# EAGLE board eNode_Spark (EAGLE 7.2.0)
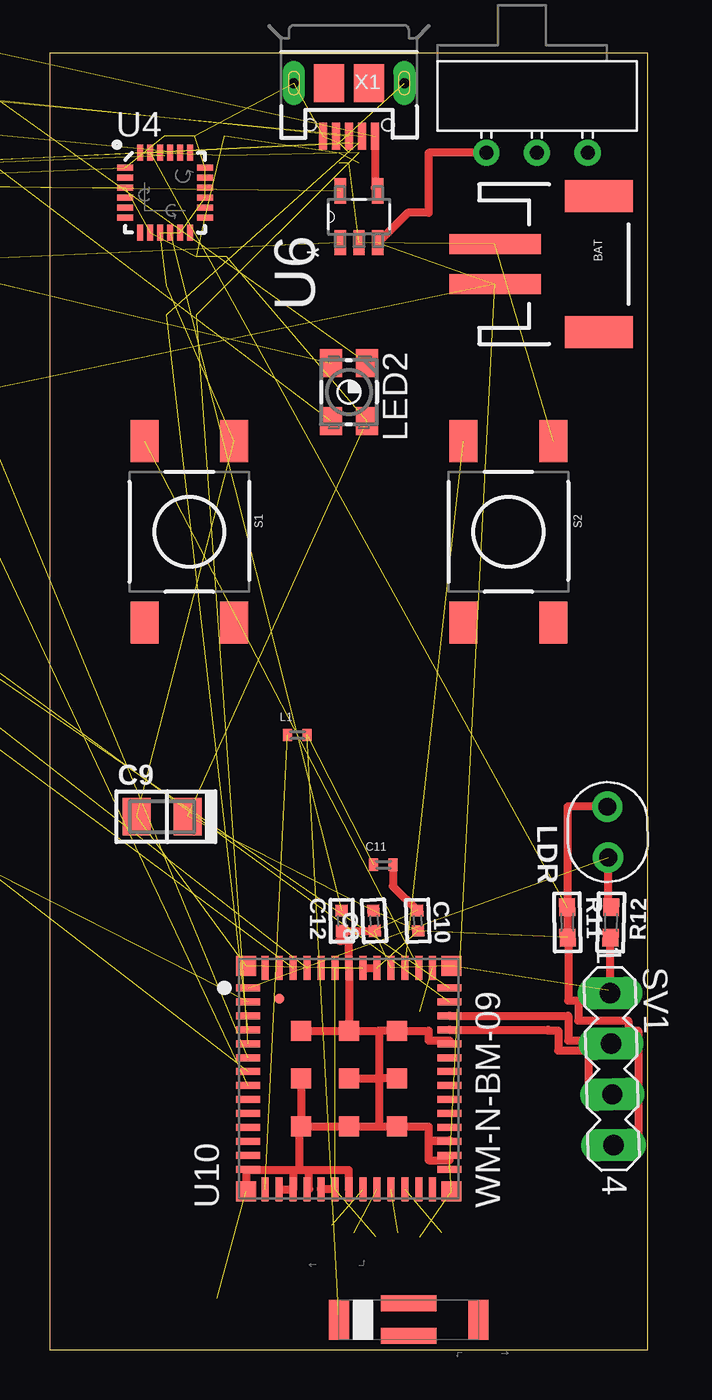
[diagram p0: board, top side]
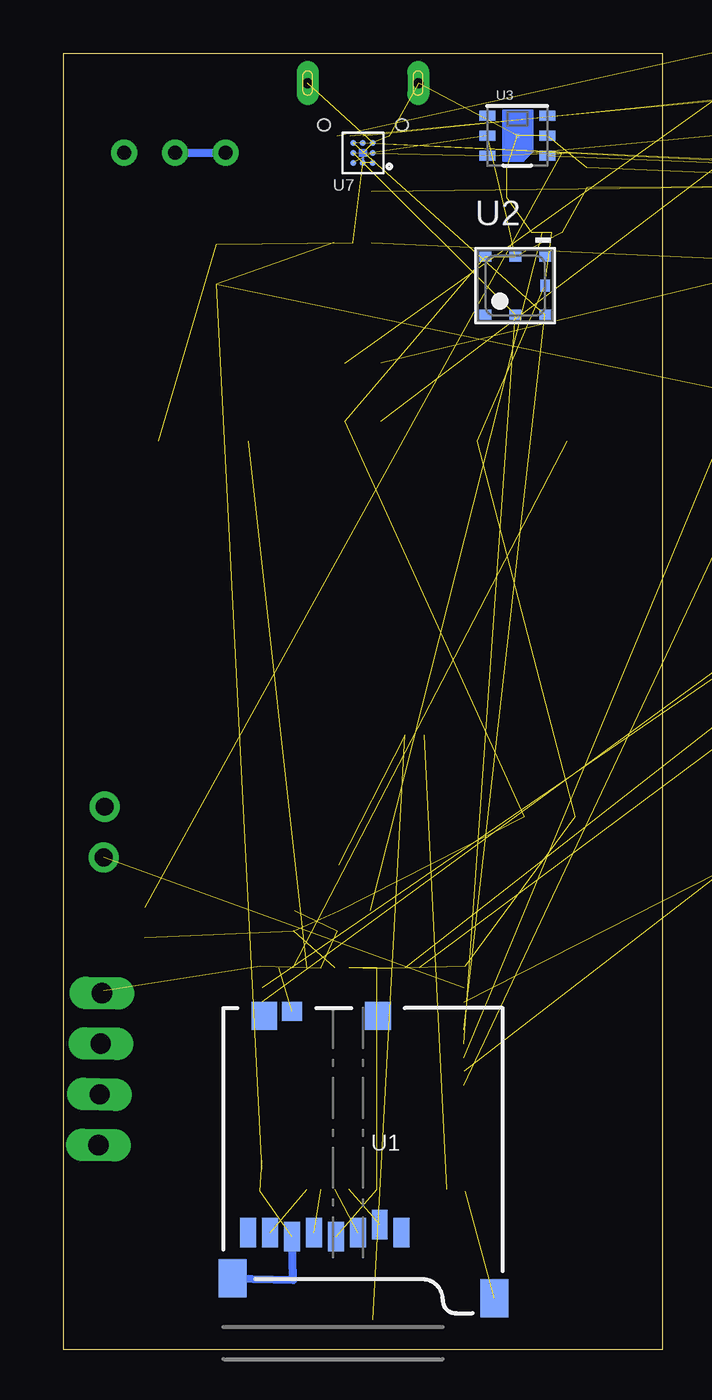
[diagram p1: board, bottom side, seen from below]

Size 30 x 65 mm. Coordinates in mm from the lower left corner, seen from the top.
Outline: 0,0 30,0 30,65 0,65 0,0
Copper layers (1+2*15+16): Top 0.018mm / dielectric 0.195mm / $GND 0.035mm / dielectric 1.1mm / $+3V3 0.035mm / dielectric 0.195mm / Bottom 0.018mm
Design rules "spark-4layer": minimum track width 6mil, minimum drill 0.3mm, track to track 6mil, track to pad 6mil, pad to pad 6mil, via to via 6mil, smd to smd 6mil, copper to edge 6mil, drill to drill 6mil, minimum pad ring 12mil, minimum via ring 8mil, stop-mask expansion 4mil, vias tented up to drill 20mil, thermal gap 8mil
Net classes: 2 RF: width 0.33 mm, clearance 0.178 mm

## Footprints (pad centres in the part's own frame; a part is rotated, then mirrored left to right if it is on the bottom)
AT7020 = smd 1 x 2: 1 3.5,0; 3 -3.5,0 | smd 2.8 x 0.8: 2 0,0.815; 4 0,-0.815
JST-2-SMD = smd 1 x 4.6: + 1,-3.7; - -1,-3.7 | smd 1.6 x 3.4: NC1 -3.4,1.5; NC2 3.4,1.5
OFFBOARD_NOSIGN = drill 1: + -1.27,0; - 1.27,0
C0402 = smd 0.6 x 0.6: 1 -0.508,0; 2 0.508,0
C1206/T = smd 1.4 x 1.9: + 1.27,0; - -1.27,0
C0402_B = smd 0.457 x 0.61: 1 -0.483,0; 2 0.483,0
C0603 = smd 1.1 x 1: 1 -0.85,0; 2 0.85,0
C0402' = smd 0.7 x 0.9: 1 -0.65,0; 2 0.65,0
DIODE-DO-220AA(SMP) = smd 0.762 x 1.27: ANODE 2.349,0 | smd 2.667 x 2.286: CATHODE 0,0
L0402_B = smd 0.457 x 0.61: 1 -0.483,0; 2 0.483,0
INDUCTOR-NR3015 = smd 0.8 x 2.7: 1 -1.1,0; 2 1.1,0
ON_BOARD = drill 0.9: 1 -1.27,0; 2 1.27,0
RA_SMD_LED = smd 1.4 x 0.9: A 1.2,0; C -1.2,0
P-LCC-4-3 = smd 1.1 x 1.4: 1 -0.9,-1.45; 2 0.9,-1.45; 3 0.9,1.45; 4 -0.9,1.45
R0603 = smd 0.9 x 0.8: 1 -0.762,0; 2 0.762,0
R0402_B = smd 0.457 x 0.61: 1 -0.483,0; 2 0.483,0
R0402 = smd 0.6 x 0.6: 1 -0.508,0; 2 0.508,0
TACTILE_SWITCH_SMD = smd 1.4 x 2.1: 1 2.25,4.55; 2 2.25,-4.55; 3 -2.25,4.55; 4 -2.25,-4.55
MA04-1 = drill 1.016 long: 1 -3.81,0; 2 -1.27,0; 3 1.27,0; 4 3.81,0
CHANGE_OVER_SLIDE = drill 0.7: 1 0,0; 2 -2.54,0; 3 2.54,0
MICRO-SD-SOCKET-PP = smd 0.8 x 1.5: 1 7.54,-11.26; 2 6.44,-10.86; 3 5.34,-11.26; 4 4.24,-11.46; 5 3.14,-11.26; 6 2.04,-11.46; 7 0.94,-11.26; 8 -0.16,-11.26 | smd 1 x 0.95: CD 2.04,-0.175 | smd 1.3 x 1.4: CD1 6.35,-0.4; CD2 0.65,-0.4 | smd 1.4 x 1.9: GND1 12.2,-14.55; GND2 -0.95,-13.55
BMP180 = smd 0.6 x 0.5: 1 1.5,1.45; 2 0,1.45; 3 -1.5,1.45; 4 -1.5,-1.45; 5 0,-1.45; 6 1.5,-1.45 | smd 0.5 x 0.6: 7 1.5,0
HTU21D = smd 0.2 x 0.2: 7 0,0 | smd 0.8 x 0.5: DATA 1.5,-1; GND 1.5,0; NC@1 -1.5,1; NC@6 1.5,1; SCK -1.5,-1; VDD -1.5,0
QFN-24-NP = smd 0.8 x 0.3: 1 -2,1.25; 2 -2,0.75; 3 -2,0.25; 4 -2,-0.25; 5 -2,-0.75; 6 -2,-1.25; 13 2,-1.25; 14 2,-0.75; 15 2,-0.25; 16 2,0.25; 17 2,0.75; 18 2,1.25 | smd 0.3 x 0.8: 7 -1.25,-2; 8 -0.75,-2; 9 -0.25,-2; 10 0.25,-2; 11 0.75,-2; 12 1.25,-2; 19 1.25,2; 20 0.75,2; 21 0.25,2; 22 -0.25,2; 23 -0.75,2; 24 -1.25,2
SOT95P280X145-5N = smd 1.27 x 0.559: 1 -1.295,0.94; 2 -1.295,0; 3 -1.295,-0.94; 4 1.295,-0.94; 5 1.295,0.94
BGA8DS = smd 0.305 x 0.305: A1 0.5,-0.5; A2 0,-0.5; A3 -0.5,-0.5; B1 0.5,0; B3 -0.5,0; C1 0.5,0.5; C2 0,0.5; C3 -0.5,0.5
SOT23-5 = smd 0.55 x 1.2: 1 -0.95,-1.3; 2 0,-1.3; 3 0.95,-1.3; 4 0.95,1.3; 5 -0.95,1.3
ADMP401 = smd 0.9 x 0.9: 1 -1.2,2.62; 5 1.2,2.62; 6 0,2.62 | smd 0.7 x 0.7: 2 1.3,-0.8; 4 -1.3,-0.8 | hole 0.9: 0,0
WM-N-BM-09 = smd 0.35 x 1.2: 1 4.55,5.05; 2 3.85,5.05; 3 3.15,5.05; 4 2.45,5.05; 5 1.75,5.05; 6 1.05,5.05; 7 0.35,5.05; 8 -0.35,5.05; 9 -1.05,5.05; 10 -1.75,5.05; 11 -2.45,5.05; 12 -3.15,5.05; 13 -3.85,5.05; 14 -4.55,5.05; 28 -4.55,-5.05; 29 -3.85,-5.05; 30 -3.15,-5.05; 31 -2.45,-5.05; 32 -1.75,-5.05; 33 -1.05,-5.05; 34 -0.35,-5.05; 35 0.35,-5.05; 36 1.05,-5.05; 37 1.75,-5.05; 38 2.45,-5.05; 39 3.15,-5.05; 40 3.85,-5.05; 41 4.55,-5.05 | smd 1.2 x 0.35: 15 -5.55,4.2; 16 -5.55,3.5; 17 -5.55,2.8; 18 -5.55,2.1; 19 -5.55,1.4; 20 -5.55,0.7; 21 -5.55,0; 22 -5.55,-0.7; 23 -5.55,-1.4; 24 -5.55,-2.1; 25 -5.55,-2.8; 26 -5.55,-3.5; 27 -5.55,-4.2; 42 5.55,-4.2; 43 5.55,-3.5; 44 5.55,-2.8; 45 5.55,-2.1; 46 5.55,-1.4; 47 5.55,-0.7; 48 5.55,0; 49 5.55,0.7; 50 5.55,1.4; 51 5.55,2.1; 52 5.55,2.8; 53 5.55,3.5; 54 5.55,4.2 | smd 1 x 1: 55 5.65,5.15; 56 -5.65,5.15; 57 -5.65,-5.15; 58 5.65,-5.15; 59 2.4,2.4; 60 0,2.4; 61 -2.4,2.4; 62 2.4,0; 63 0,0; 64 -2.4,0; 65 2.4,-2.4; 66 0,-2.4; 67 -2.4,-2.4 | smd 0.5 x 0.5: 68 4,3.5
USB-MICROB-SLOT-HOLE = smd 0.4 x 1.35: D+ 0,2.675; D- -0.65,2.675; GND 1.3,2.675; ID 0.65,2.675; VBUS -1.3,2.675 | drill 0.5 pad 1.1 long: MT1 -2.775,0; MT2 2.775,0 | smd 1.5 x 1.9: P$1 -1,0; P$2 1,0.01 | hole 0.6: -1.95,2.1; 1.95,2.1

## Placement (x,y rotation side)
ANT1  AT7020  [AT7020]  18,1.5 180 top
BAT  [JST-2-SMD]  26.03,54.42 270 top
BUZZ  BUZZER  [OFFBOARD_NOSIGN]  -35.56,57.15 0 top  (outside the outline)
C1  4.7uF  [C0402]  -45.72,58.42 0 top  (outside the outline)
C2  4.7uF  [C0402]  -49.53,58.42 0 top  (outside the outline)
C3  4.7uF  [C0402]  -53.34,58.42 0 top  (outside the outline)
C4  100pF  [C0402]  -41.91,58.42 0 top  (outside the outline)
C5  1uF  [C0402]  -57.15,63.5 0 top  (outside the outline)
C6  0.1uF  [C0402]  -57.15,58.42 0 top  (outside the outline)
C7  0.1uF  [C0402]  -60.96,58.42 0 top  (outside the outline)
C8  0.1uF  [C0402]  16.26,21.5 93.3 top
C9  10uF  [C1206/T]  5.63,26.72 0 top
C10  0.1uF  [C0402]  18.45,21.5 272.3 top
C11  0.8pF +/-0.25pF (RF)  [C0402_B]  16.72,24.31 0 top
C12  0.1uF  [C0402]  14.64,21.5 90.4 top
C13  0.1uF  [C0402]  -26.67,63.5 0 top  (outside the outline)
C14  2.2nF  [C0402]  -30.48,63.5 0 top  (outside the outline)
C15  0.1uF  [C0402]  -34.29,63.5 0 top  (outside the outline)
C16  10nF  [C0402]  -41.91,63.5 0 top  (outside the outline)
C17  0.1uF  [C0402_B]  -25.4,67.31 0 top  (outside the outline)
C18  0.1uF  [C0402_B]  -29.21,67.31 0 top  (outside the outline)
C19  0.1uF  [C0402_B]  -33.02,67.31 0 top  (outside the outline)
C20  10uF  [C0402_B]  -36.83,67.31 0 top  (outside the outline)
C21  10uF  [C0402_B]  -40.64,67.31 0 top  (outside the outline)
C22  10uF  [C0402_B]  -44.45,67.31 0 top  (outside the outline)
C23  22uF  [C0603]  -44.45,52.07 0 top  (outside the outline)
C24  22uF  [C0603]  -50.8,52.07 0 top  (outside the outline)
C25  0.1uF  [C0402']  -38.1,52.07 0 top  (outside the outline)
D1  DIODE  [DIODE-DO-220AA(SMP)]  -26.67,69.85 0 top  (outside the outline)
L1  3.3nH (RF)  [L0402_B]  12.41,30.81 0 top
L2  2.2uH - NR3015T2R2M  [INDUCTOR-NR3015]  -60.96,62.23 0 top  (outside the outline)
LDR  PHOTOCELLONB  [ON_BOARD]  27.98,25.95 90.8 top
LED  [RA_SMD_LED]  -30.48,69.85 0 top  (outside the outline)
LED2  CREE_CLVBA-FKA  [P-LCC-4-3]  15,48 0 top
R1  100  [R0603]  -62.23,52.07 0 top  (outside the outline)
R2  2K  [R0603]  -15.24,58.42 0 top  (outside the outline)
R3  22  [R0402_B]  -48.26,67.31 0 top  (outside the outline)
R4  1.5K  [R0402]  -45.72,63.5 0 top  (outside the outline)
R5  100K  [R0402]  -38.1,63.5 0 top  (outside the outline)
R6  10K  [R0402]  -49.53,63.5 0 top  (outside the outline)
R7  10K  [R0402]  -53.34,63.5 0 top  (outside the outline)
R8  22  [R0402_B]  -52.07,67.31 0 top  (outside the outline)
R9  100K  [R0402_B]  -55.88,67.31 0 top  (outside the outline)
R10  1K  [R0402_B]  -59.69,67.31 0 top  (outside the outline)
R11  4.7K  [R0603]  25.95,21.42 270.9 top
R12  10K  [R0603]  28.14,21.42 268.6 top
R13  10K  [R0603]  -26.67,58.42 0 top  (outside the outline)
R14  1K  [R0402_B]  -13.97,71.12 0 top  (outside the outline)
R15  1K  [R0402_B]  -17.78,71.12 0 top  (outside the outline)
R16  4.7K  [R0603]  -30.48,58.42 0 top  (outside the outline)
S1  [TACTILE_SWITCH_SMD]  7,41 0 top
S2  [TACTILE_SWITCH_SMD]  23,41 0 top
SV1  [MA04-1]  28.18,14.07 271.3 top
SW  SWITCHSLIDE  [CHANGE_OVER_SLIDE]  24.43,60 0 top
U1  USD-SOCKETSMD  [MICRO-SD-SOCKET-PP]  20.6,17.13 0 bottom
U2  BMP180  [BMP180]  7.37,53.34 0 bottom
U3  HTU21DSMD  [HTU21D]  7.26,60.86 0 bottom
U4  [QFN-24-NP]  5.78,58 0 top
U6  MCP73831T-2ACI/OT  [SOT95P280X145-5N]  15.51,56.79 90 top
U7  TMP006  [BGA8DS]  15,60 0 bottom
U8  OPA344  [SOT23-5]  -54.61,52.07 0 top  (outside the outline)
U9  ADMP401  [ADMP401]  -41.91,36.83 0 top  (outside the outline)
U10  WM-N-BM-09  [WM-N-BM-09]  15,13.59 90 top
U$7  R8008-33  [SOT23-5]  -52.07,36.83 0 top  (outside the outline)
X1  USB-MICROB  [USB-MICROB-SLOT-HOLE]  15,63.5 180 top

## Library data of the parts
ANT1 C11 C17-C22 D1 L1 L2 R3 R8-R10 R14 R15 U10 U$7 X1 = Spark
BAT = Battery
BUZZ = Buzzer
C1-C10 C12-C16 R1 R2 R4-R7 R11-R13 R16 = rc-master-smd
C23 C24 = rcl
C25 = adafruit
LDR = LDR
LED = LED
LED2 = SMD RGB LED
S1 S2 = TACT BUTTON
SV1 = con-lstb; OC_FARNELL: unknown; OC_NEWARK: unknown
SW = Switch
U1 = MicroSD; ORDERCODE: 2143377; SUPPLIER: ELEMENT14
U2 = BMP180
U3 = HTU21D
U4 = MPU-9150
U6 = MCP73831T (LiPo Charger); MPN: MCP73831T-2ACI/OT; OC_FARNELL: 1332158; OC_NEWARK: 56K7045; PACKAGE: SOT-5; SUPPLIER: Microchip
U7 = TMP006
U8 = OPA344
U9 = ADMP401

## Nets
!MODE: U10.53
!RST: U10.26
+3V3: C6.2 C7.2 C8.2 C9.+ C10.2 C13.2 C15.2 C16.2 C17.2 C18.2 C19.2 C20.1 C21.2 C22.1 C24.1 C25.1 L2.2 LDR.2 LED2.2 R7.1 R11.2 R13.2 R16.1 SV1.4 U1.4 U2.2 U2.3 U3.VDD U4.3 U4.8 U4.13 U7.A3 U7.B1 U8.5 U9.5 U10.19 U10.20 U10.46 U10.47 U10.49 U$7.5
A0: U10.54
ANT [RF]: L1.1 U10.15
BTCX_RF_ACTIVE: U10.9
BTCX_STATUS: U10.10
BTCX_TXCONF: U10.11
BUZZ+: BUZZ.+ U10.41
BUZZ-: BUZZ.- U10.40
D2: U10.3
ENABLE [vcc]: R9.1 U$7.1
GND: BAT.- C1.1 C2.1 C5.2 C6.1 C7.1 C8.1 C9.- C10.1 C11.2 C12.1 C13.1 C14.1 C15.1 C16.1 C17.1 C18.1 C19.1 C20.2 C21.1 C22.2 C23.2 C24.2 C25.2 R2.1 R6.2 R12.2 S1.1 S2.1 SV1.1 U1.6 U1.GND1 U1.GND2 U2.7 U3.7 U3.GND U4.1 U4.9 U4.11 U4.15 U4.17 U4.18 U6.2 U7.A1 U7.A2 U7.C1 U8.2 U9.2 U9.4 U9.6 U10.14 U10.16 U10.17 U10.18 U10.21 U10.29 U10.30 U10.37 U10.45 U10.48 U10.50 U10.55 U10.56 U10.57 U10.58 U10.59 U10.60 U10.61 U10.62 U10.63 U10.64 U10.65 U10.66 U10.67 U$7.2 X1.GND X1.MT1 X1.MT2
LDR: LDR.1 R12.1 U10.1
MCU_USB_DM: R8.1 U10.52
MCU_USB_DP: R3.1 U10.51
MIC: C4.1 R5.1 U8.1 U10.2
MISO: U1.7 U10.25
MOSI: U1.3 U10.23
N$1 [RF]: ANT1.1 C11.1 L1.2
N$2: C3.2 U9.1
N$3: L2.1 U$7.3
N$4: R2.2 U6.5
N$5: LED.C R1.1
N$6: R1.2 U6.1
N$7: C3.1 R4.2
N$8: C4.2 R4.1 R5.2 U8.4
N$9: C5.1 R6.1 R7.2 U8.3
N$12: C14.2 U4.20
N$13: R13.1 U7.C2
N$14: C12.2 U4.10
N$17: R8.2 X1.D-
N$18: R3.2 X1.D+
N$27: LED2.3 R14.1
N$29: LED2.4 R10.1
N$54: LED2.1 R15.1
PBL: S1.3 U10.43
PBR: S2.3 U10.44
RF_SW_CTRL0_ANT0: U10.13
RF_SW_CTRL3_ANT1: U10.12
RGB_BLUE: R14.2 U10.6
RGB_GREEN [vcc]: R10.2 U10.7
RGB_RED: R15.2 U10.8
RX: SV1.3 U10.38
SCK: U1.5 U10.24
SCL: R11.1 U2.5 U3.SCK U4.23 U7.B3 U10.5
SD_CD: U1.CD U10.42
SD_CS: U1.2 U10.22
SDA: R16.2 U2.6 U3.DATA U4.24 U7.C3 U10.4
TX: SV1.2 U10.39
UVCC: C1.2 D1.ANODE LED.A U6.4 X1.VBUS
VBAT: BAT.+ C2.2 C23.1 D1.CATHODE R9.2 SW.1 SW.2 U6.3 U10.28 U$7.4
WKP: U10.27

## Tracks (layer width: path | path; a pad name or v marks a point on that pad's centre or on a via)
+3V3  (36 unrouted)
  Top 0.406: SV1.4 29.5,10.26 | 29.5,10.26 29.5,10 | 29.5,10.26 29.5,16 29,16 29,16.5 26.5,16.5 26.5,17.5 26,17.5 26,20.66 R11.2 25.96,27.22 LDR.2 | U10.20 U10.19 | U10.47 U10.46
ANT  (1 unrouted)
BUZZ+  (1 unrouted)
BUZZ-  (1 unrouted)
ENABLE  (1 unrouted)
GND  (54 unrouted)
  Top 0.406: 28.5,18 28.5,17.88 SV1.1 28,17.88 28,18 28.12,18 R12.2 | C8.1 C12.1 14.64,20.5 | 16.5,11.19 U10.64 U10.61 | 16.5,11.19 U10.67 19,11.19 19,10.5 20.05,10.5 U10.30 19,10.44 19,9.5 20.05,9.5 U10.29 | 16.5,15.99 U10.65 19,15.99 | 16.5,15.99 16.5,13.59 | 16.5,13.59 16.5,11.19 | U10.61 12.5,11.19 12.5,9 | 12.2,9 9.95,9 | 9.95,9 U10.14 | 9.95,9 9.85,9 U10.56 | 12.5,9 12.2,9 | 12.2,9 U10.17 U10.16 | U10.18 13,8.04 13,9 | 13,9 12.5,9 | U10.21 15,9 13,9 | U10.60 U10.61 | U10.66 16.5,13.59 | 19,15.99 19,16 | 19,15.99 19,15.5 20.05,15.5 U10.37 | U10.59 U10.62 | U10.62 16.5,15.99 | U10.63 16.5,13.59 | 14.64,20.5 15,20.5 U10.48 U10.62 | 14.5,20.5 14.64,20.5 | C11.2 17.2,23.23 C10.1
  Bottom 0.406: U1.GND2 18.5,3.5 U1.6
LDR  (1 unrouted)
  Top 0.406: R12.1 28,22.18 LDR.1
MCU_USB_DM  (1 unrouted)
MCU_USB_DP  (1 unrouted)
MIC  (3 unrouted)
MISO  (1 unrouted)
MOSI  (1 unrouted)
N$1  (2 unrouted)
N$2  (1 unrouted)
N$3  (1 unrouted)
N$4  (1 unrouted)
N$5  (1 unrouted)
N$6  (1 unrouted)
N$7  (1 unrouted)
N$8  (3 unrouted)
N$9  (3 unrouted)
N$12  (1 unrouted)
N$13  (1 unrouted)
N$14  (1 unrouted)
N$17  (1 unrouted)
N$18  (1 unrouted)
N$27  (1 unrouted)
N$29  (1 unrouted)
N$54  (1 unrouted)
PBL  (1 unrouted)
PBR  (1 unrouted)
RGB_BLUE  (1 unrouted)
RGB_GREEN  (1 unrouted)
RGB_RED  (1 unrouted)
RX
  Top 0.406: U10.38 25,16.04 25,16 25.5,16 25.5,15 27,15 27,13 28.21,13 SV1.3
SCK  (1 unrouted)
SCL  (5 unrouted)
SD_CD  (1 unrouted)
SD_CS  (1 unrouted)
SDA  (5 unrouted)
TX
  Top 0.406: U10.39 26,16.74 26,15.5 28.15,15.5 SV1.2
UVCC  (3 unrouted)
  Top 0.406: X1.VBUS 16.3,58.24 U6.4
VBAT  (7 unrouted)
  Top 0.406: SW.2 19,60 19,57 17.95,57 U6.3
  Bottom 0.406: SW.1 SW.2

## Text on the board
tDocu: NOTES: / / Layer stack up: / 1 - GTL - Top Copper / 2 - G2L - Inner Ground / 15 - G15L - Inner +3.3V / 16 - GBL - Bottom Copper